# Altium PCB 00Key.PcbDoc (part 4 of 4)
Units mm, origin at the board's own origin, x right, y up, seen from the top; angles counter-clockwise.
Board outline 304.8 x 170.81 mm, 2 copper layers (F.Cu, B.Cu); 268 components, 236 nets, 1532 pads, 61 vias.
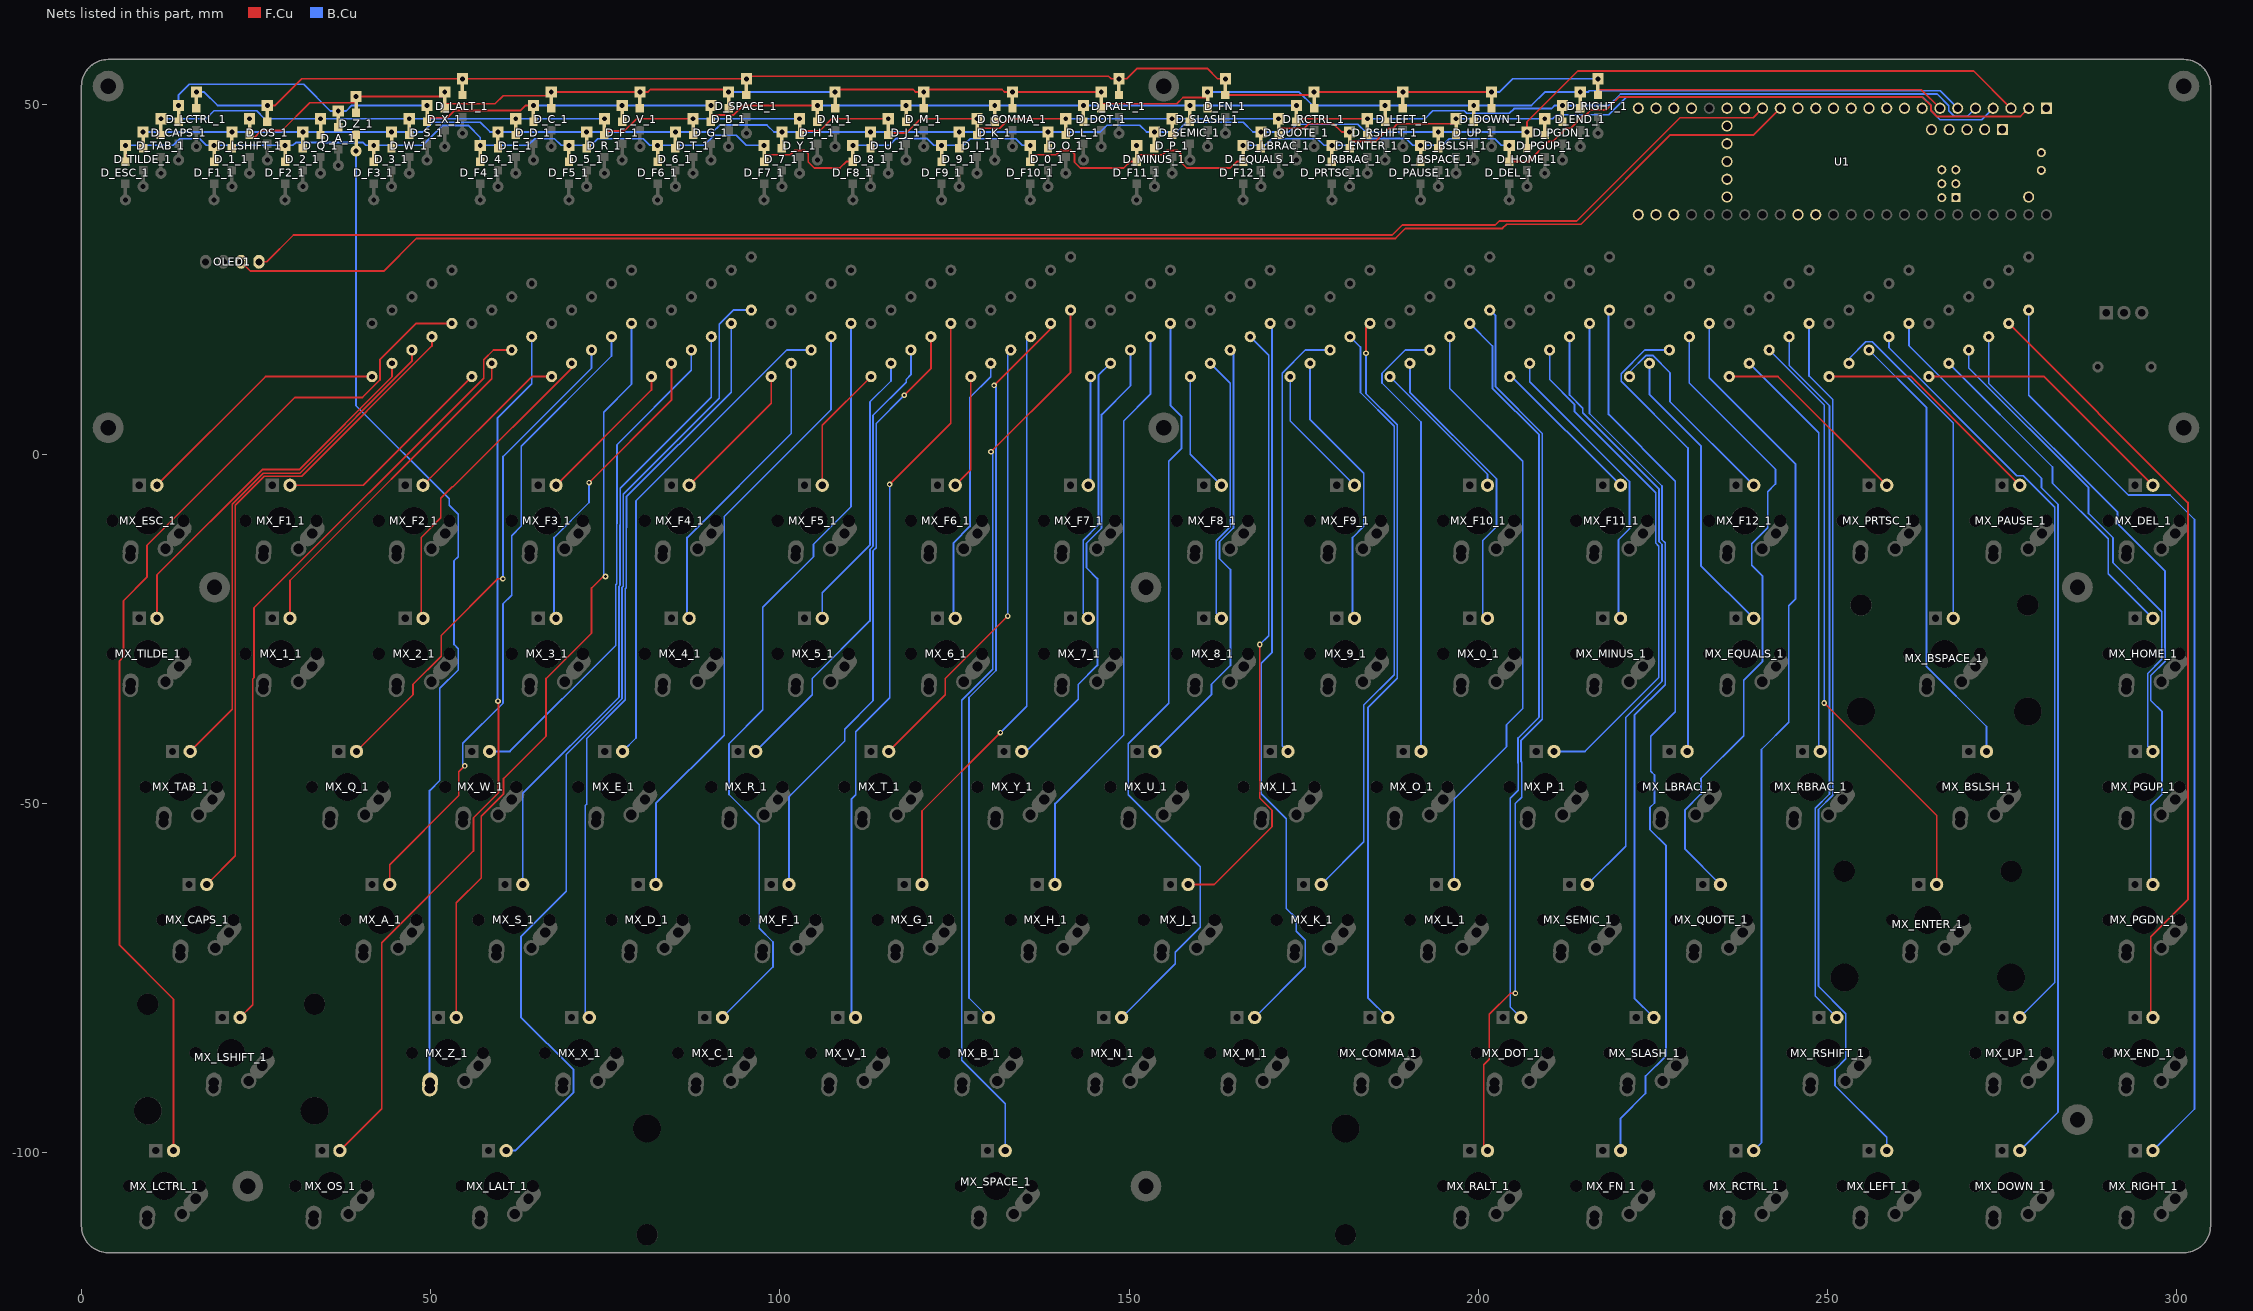
[diagram p4: the nets of this part, all layers, seen from the top]

## Via types
v1: diameter 0.8, hole 0.4, F.Cu to B.Cu, tented both sides, 61 vias

## Nets (pads, with @x,y where several pads share a name; then routed paths per layer and width w, separated by ;. In a path a pad name is that pad's centre, name@x,y a point inside that pad or via, vN(x,y) a via of type N, cw(c..) or ccw(c..) an arc to the next point about the centre after c; other vN are vias at no path point) (continued)
Net-(D_Z_1-Pad2): D_Z_1.2 MX_Z_1.2 | length 144.8
  F.Cu w0.25: D_Z_1.2@39.306,43.408 D_Z_1.2@39.306,44.608 D_Z_1.2@39.306,45.732
  B.Cu w0.25: D_Z_1.2@39.306,43.408 39.306,6.951 52.635,-6.377 52.635,-7.294 53.947,-8.606 53.947,-14.652 53.325,-15.274 53.325,-27.221 53.927,-27.823 53.927,-30.89 51.295,-33.522 51.295,-46.702 49.84,-48.157 49.84,-90.177 49.887,-90.225 49.847,-90.265 MX_Z_1.2@49.847,-90.804
Net-(MX_0_1-Pad3): MX_0_1.3 R_0_1.1 | length 42.8
  B.Cu w0.25: R_0_1.1@190.183,13.018 190.183,8.891 202.574,-3.5 202.574,-10.364 200.593,-12.344 200.593,-22.793 MX_0_1.3@201.294,-23.494
Net-(MX_1_1-Pad3): MX_1_1.3 R_1_1.1 | length 48.5
  F.Cu w0.25: MX_1_1.3@29.845,-23.494 29.845,-18.078 58.737,10.814 R_1_1.1@58.737,13.018
Net-(MX_2_1-Pad3): MX_2_1.3 R_2_1.1 | length 45.6
  F.Cu w0.25: MX_2_1.3@48.895,-23.494 48.627,-23.227 48.627,-11.927 51.448,-9.106 51.448,-6.301 53.105,-4.644 53.19,-4.644 70.168,12.333 R_2_1.1@70.168,13.018
Net-(MX_3_1-Pad3): MX_3_1.3 R_3_1.1 | length 43.6
  F.Cu w0.25: v1(72.666,-4.061) 84.454,7.728 R_3_1.1@84.454,13.018
  B.Cu w0.25: MX_3_1.3@67.944,-23.494 67.65,-23.2 67.65,-11.932 72.666,-6.916 v1(72.666,-4.061)
Net-(MX_4_1-Pad3): MX_4_1.3 R_4_1.1 | length 42.8
  B.Cu w0.25: MX_4_1.3@86.994,-23.494 86.699,-23.199 86.699,-11.933 101.601,2.969 R_4_1.1@101.601,13.018
Net-(MX_5_1-Pad3): MX_5_1.3 R_5_1.1 | length 40.6
  B.Cu w0.25: MX_5_1.3@106.044,-23.494 106.044,-19.831 112.872,-13.004 112.872,7.474 115.887,10.489 R_5_1.1@115.887,13.018
Net-(MX_6_1-Pad3): MX_6_1.3 R_6_1.1 | length 38.8
  B.Cu w0.25: MX_6_1.3@125.094,-23.494 124.85,-23.25 124.85,-12.674 127.193,-10.331 127.193,8.122 130.174,11.103 R_6_1.1@130.174,13.018
Net-(MX_7_1-Pad3): MX_7_1.3 R_7_1.1 | length 38.4
  B.Cu w0.25: MX_7_1.3@144.144,-23.494 143.427,-22.777 143.427,-12.293 145.588,-10.132 145.588,11.285 R_7_1.1@147.321,13.018
Net-(MX_8_1-Pad3): MX_8_1.3 R_8_1.1 | length 38.8
  B.Cu w0.25: R_8_1.1@161.607,13.018 164.472,10.153 164.472,-10.359 162.466,-12.365 162.466,-22.766 MX_8_1.3@163.194,-23.494
Net-(MX_9_1-Pad3): MX_9_1.3 R_9_1.1 | length 40.5
  B.Cu w0.25: R_9_1.1@175.894,13.018 175.894,4.932 183.56,-2.733 183.56,-10.328 181.976,-11.912 181.976,-23.226 MX_9_1.3@182.244,-23.494
Net-(MX_A_1-Pad3): MX_A_1.3 R_A_1.1 | length 91.8
  F.Cu w0.25: MX_A_1.3@44.133,-61.594 44.133,-58.746 54.021,-48.858 54.021,-45.48 v1(54.883,-44.619)
  B.Cu w0.25: v1(54.883,-44.619) 54.587,-44.323 54.587,-41.401 60.353,-35.635 60.353,-21.43 61.59,-20.192 61.59,-11.649 62.964,-10.275 62.964,1.148 75.882,14.067 R_A_1.1@75.882,16.828
Net-(MX_B_1-Pad3): MX_B_1.3 R_B_1.1 | length 105.6
  F.Cu w0.25: v1(130.655,9.861) 138.748,17.954 R_B_1.1@138.748,18.732
  B.Cu w0.25: MX_B_1.3@129.857,-80.644 127.054,-77.841 127.054,-34.832 130.93,-30.955 130.93,9.586 v1(130.655,9.861)
Net-(MX_BSLSH_1-Pad3): MX_BSLSH_1.3 R_BSLSH_1.1 | length 64.4
  B.Cu w0.25: R_BSLSH_1.1@255.904,14.922 264.153,6.674 264.153,-30.402 272.733,-38.982 MX_BSLSH_1.3@272.733,-42.544
Net-(MX_BSPACE_1-Pad3): MX_BSPACE_1.3 R_BSPACE_1.1 | length 49.4
  B.Cu w0.25: R_BSPACE_1.1@253.047,13.018 253.047,13.685 255.452,16.09 256.358,16.09 267.971,4.478 MX_BSPACE_1.3@267.971,-23.494
Net-(MX_C_1-Pad3): MX_C_1.3 R_C_1.1 | length 112.2
  B.Cu w0.25: MX_C_1.3@91.757,-80.644 99.003,-73.399 99.003,-69.838 97.014,-67.849 97.014,-53.021 92.703,-48.71 92.703,-41.433 97.533,-36.602 97.533,-21.92 104.79,-14.663 104.79,-12.891 110.172,-7.509 R_C_1.1@110.172,18.732
Net-(MX_CAPS_1-Pad3): MX_CAPS_1.3 R_CAPS_1.1 | length 94.9
  F.Cu w0.25: MX_CAPS_1.3@17.939,-61.594 22.026,-57.507 22.026,-7.323 26.183,-3.167 31.508,-3.167 50.165,15.491 R_CAPS_1.1@50.165,16.828
Net-(MX_COMMA_1-Pad3): MX_COMMA_1.3 R_COMMA_1.1 | length 104.4
  F.Cu w0.25: v1(183.893,14.469) 183.893,18.158 R_COMMA_1.1@184.468,18.732
  B.Cu w0.25: v1(183.893,14.469) 183.893,8.687 188.38,4.199 188.38,-32.061 184.166,-36.275 184.166,-77.803 MX_COMMA_1.3@187.007,-80.644
Net-(MX_D_1-Pad3): MX_D_1.3 R_D_1.1 | length 88.8
  B.Cu w0.25: MX_D_1.3@82.233,-61.594 82.233,-49.992 92.005,-40.219 92.005,-8.909 107.314,6.4 R_D_1.1@107.314,16.828
Net-(MX_DEL_1-Pad3): MX_DEL_1.3 R_DEL_1.1 | length 38.5
  F.Cu w0.25: R_DEL_1.1@264.477,11.112 280.988,11.112 MX_DEL_1.3@296.544,-4.444
Net-(MX_DOT_1-Pad3): MX_DOT_1.3 R_DOT_1.1 | length 105.9
  B.Cu w0.25: R_DOT_1.1@198.754,18.732 201.994,15.493 201.994,9.464 208.675,2.783 208.675,-37.613 205.651,-40.637 205.651,-44.191 205.697,-44.236 205.697,-48.107 204.555,-49.248 204.555,-79.142 MX_DOT_1.3@206.058,-80.644
Net-(MX_DOWN_1-Pad3): MX_DOWN_1.3 R_DOWN_1.1 | length 129.5
  B.Cu w0.25: R_DOWN_1.1@261.621,18.732 261.621,15.561 280.603,-3.421 280.603,-4.799 282.968,-7.164 282.968,-94.221 MX_DOWN_1.3@277.494,-99.694
Net-(MX_E_1-Pad3): MX_E_1.3 R_E_1.1 | length 70.7
  B.Cu w0.25: MX_E_1.3@77.471,-42.544 79.389,-40.626 79.389,-6.649 100.961,14.922 R_E_1.1@104.457,14.922
Net-(MX_END_1-Pad3): MX_END_1.3 R_END_1.1 | length 112.3
  F.Cu w0.25: R_END_1.1@275.907,18.732 301.561,-6.921 301.561,-63.771 296.252,-69.079 296.252,-80.352 MX_END_1.3@296.544,-80.644
Net-(MX_ENTER_1-Pad3): MX_ENTER_1.3 R_ENTER_1.1 | length 86.4
  F.Cu w0.25: v1(249.485,-35.616) 265.589,-51.719 MX_ENTER_1.3@265.589,-61.594
  B.Cu w0.25: R_ENTER_1.1@241.617,14.922 249.485,7.055 v1(249.485,-35.616)
Net-(MX_EQUALS_1-Pad3): MX_EQUALS_1.3 R_EQUALS_1.1 | length 42.7
  B.Cu w0.25: R_EQUALS_1.1@224.472,13.018 224.472,8.581 231.844,1.209 231.844,-15.944 MX_EQUALS_1.3@239.394,-23.494
Net-(MX_ESC_1-Pad3): MX_ESC_1.3 R_ESC_1.1 | length 37.2
  F.Cu w0.25: MX_ESC_1.3@10.795,-4.444 26.352,11.112 R_ESC_1.1@41.593,11.112
Net-(MX_F1_1-Pad3): MX_F1_1.3 R_F1_1.1 | length 32.5
  F.Cu w0.25: MX_F1_1.3@29.845,-4.444 40.323,-4.444 R_F1_1.1@55.88,11.112
Net-(MX_F2_1-Pad3): MX_F2_1.3 R_F2_1.1 | length 24.9
  F.Cu w0.25: MX_F2_1.3@48.895,-4.444 64.452,11.112 R_F2_1.1@67.311,11.112
Net-(MX_F3_1-Pad3): MX_F3_1.3 R_F3_1.1 | length 21.2
  F.Cu w0.25: MX_F3_1.3@67.944,-4.444 81.597,9.209 R_F3_1.1@81.597,11.112
Net-(MX_F4_1-Pad3): MX_F4_1.3 R_F4_1.1 | length 20.4
  F.Cu w0.25: MX_F4_1.3@86.994,-4.444 98.742,7.304 R_F4_1.1@98.742,11.112
Net-(MX_F5_1-Pad3): MX_F5_1.3 R_F5_1.1 | length 18.5
  F.Cu w0.25: MX_F5_1.3@106.044,-4.444 106.044,4.126 R_F5_1.1@113.031,11.112
Net-(MX_F6_1-Pad3): MX_F6_1.3 R_F6_1.1 | length 16.5
  F.Cu w0.25: MX_F6_1.3@125.094,-4.444 127.317,-2.221 R_F6_1.1@127.317,11.112
Net-(MX_F7_1-Pad3): MX_F7_1.3 R_F7_1.1 | length 15.7
  B.Cu w0.25: MX_F7_1.3@144.144,-4.444 144.463,-4.126 R_F7_1.1@144.463,11.112
Net-(MX_F8_1-Pad3): MX_F8_1.3 R_F8_1.1 | length 17.4
  B.Cu w0.25: R_F8_1.1@158.751,11.112 158.751,-0.001 MX_F8_1.3@163.194,-4.444
Net-(MX_F9_1-Pad3): MX_F9_1.3 R_F9_1.1 | length 19.4
  B.Cu w0.25: R_F9_1.1@173.037,11.112 173.037,4.763 MX_F9_1.3@182.244,-4.444
Net-(MX_F10_1-Pad3): MX_F10_1.3 R_F10_1.1 | length 21.3
  B.Cu w0.25: R_F10_1.1@187.324,11.112 201.294,-2.857 MX_F10_1.3@201.294,-4.444
Net-(MX_F11_1-Pad3): MX_F11_1.3 R_F11_1.1 | length 22.3
  B.Cu w0.25: R_F11_1.1@204.471,11.112 204.787,11.112 MX_F11_1.3@220.344,-4.444
Net-(MX_F12_1-Pad3): MX_F12_1.3 R_F12_1.1 | length 29.6
  B.Cu w0.25: R_F12_1.1@221.614,11.112 221.614,11.768 223.999,14.152 224.942,14.152 227.412,11.682 227.412,7.538 MX_F12_1.3@239.394,-4.444
Net-(MX_F_1-Pad3): MX_F_1.3 R_F_1.1 | length 86.8
  F.Cu w0.25: v1(117.804,8.432) 121.602,12.23 R_F_1.1@121.602,16.828
  B.Cu w0.25: MX_F_1.3@101.282,-61.594 101.282,-49.023 109.258,-41.047 109.258,-39.366 113.322,-35.303 113.322,-13.828 113.773,-13.377 113.773,4.401 v1(117.804,8.432)
Net-(MX_FN_1-Pad3): MX_FN_1.3 R_FN_1.1 | length 129.9
  B.Cu w0.25: R_FN_1.1@218.757,20.637 218.626,20.506 218.626,5.702 228.185,-3.857 228.185,-36.87 224.666,-40.388 224.666,-45.382 225.199,-45.914 225.199,-49.927 224.562,-50.564 224.562,-53.775 226.854,-56.066 226.854,-86.09 223.918,-89.026 223.918,-91.507 220.344,-95.081 MX_FN_1.3@220.344,-99.694
Net-(MX_G_1-Pad3): MX_G_1.3 R_G_1.1 | length 84.9
  F.Cu w0.25: MX_G_1.3@120.332,-61.594 120.332,-51.073 v1(131.554,-39.851)
  B.Cu w0.25: v1(131.554,-39.851) 135.337,-36.069 135.337,16.274 R_G_1.1@135.891,16.828
Net-(MX_H_1-Pad3): MX_H_1.3 R_H_1.1 | length 84.1
  B.Cu w0.25: MX_H_1.3@139.382,-61.594 139.382,-50.017 149.201,-40.198 149.201,4.751 153.034,8.584 R_H_1.1@153.034,16.828
Net-(MX_HOME_1-Pad3): MX_HOME_1.3 R_HOME_1.1 | length 48.6
  B.Cu w0.25: R_HOME_1.1@267.334,13.018 282.179,-1.827 282.179,-4.146 290.159,-12.126 290.159,-17.109 MX_HOME_1.3@296.544,-23.494
Net-(MX_I_1-Pad3): MX_I_1.3 R_I_1.1 | length 62.7
  B.Cu w0.25: MX_I_1.3@172.721,-42.544 171.912,-41.736 171.912,11.617 175.218,14.922 R_I_1.1@178.752,14.922
Net-(MX_J_1-Pad3): MX_J_1.3 R_J_1.1 | length 87.9
  F.Cu w0.25: MX_J_1.3@158.433,-61.594 162.167,-61.594 170.434,-53.328 170.434,-50.973 168.671,-49.21 v1(168.671,-27.243)
  B.Cu w0.25: R_J_1.1@167.322,16.828 169.955,14.195 169.955,-25.959 v1(168.671,-27.243)
Net-(MX_K_1-Pad3): MX_K_1.3 R_K_1.1 | length 85.4
  B.Cu w0.25: MX_K_1.3@177.482,-61.594 183.58,-55.497 183.58,-35.895 187.925,-31.55 187.925,4.018 183.102,8.841 183.102,15.336 R_K_1.1@181.611,16.828
Net-(MX_L_1-Pad3): MX_L_1.3 R_L_1.1 | length 86.8
  B.Cu w0.25: R_L_1.1@195.897,16.828 195.897,9.407 206.324,-1.019 206.324,-36.399 204.005,-38.717 204.005,-41.878 196.532,-49.351 MX_L_1.3@196.532,-61.594
Net-(MX_LALT_1-Pad3): MX_LALT_1.3 R_LALT_1.1 | length 143.4
  B.Cu w0.25: MX_LALT_1.3@60.801,-99.694 62.125,-99.694 70.455,-91.365 70.455,-88.124 62.908,-80.577 62.908,-69.061 69.393,-62.577 69.393,-42.979 77.398,-34.974 77.398,-19.072 77.548,-18.922 77.548,-10.322 77.568,-10.302 77.568,-5.708 91.299,8.023 91.299,18.602 93.335,20.637 R_LALT_1.1@95.884,20.637
Net-(MX_LBRAC_1-Pad3): MX_LBRAC_1.3 R_LBRAC_1.1 | length 66.4
  B.Cu w0.25: R_LBRAC_1.1@227.331,14.922 223.827,14.922 220.446,11.542 220.446,10.436 230,0.882 230,-42.415 MX_LBRAC_1.3@229.871,-42.544
Net-(MX_LCTRL_1-Pad3): MX_LCTRL_1.3 R_LCTRL_1.1 | length 150
  F.Cu w0.25: MX_LCTRL_1.3@13.176,-99.694 13.176,-78.017 5.458,-70.299 5.458,-29.583 6.023,-29.018 6.023,-20.974 9.369,-17.628 9.369,-13.057 30.544,8.119 40.216,8.119 42.722,10.625 42.722,13.518 47.937,18.732 R_LCTRL_1.1@53.023,18.732
Net-(MX_LEFT_1-Pad3): MX_LEFT_1.3 R_LEFT_1.1 | length 126
  B.Cu w0.25: R_LEFT_1.1@247.332,18.732 247.332,11.205 250.7,7.838 250.7,-48.841 248.676,-50.865 248.676,-76.168 252.596,-80.088 252.596,-86.543 251.043,-88.095 251.043,-90.396 258.444,-97.798 MX_LEFT_1.3@258.444,-99.694
Net-(MX_LSHIFT_1-Pad3): MX_LSHIFT_1.3 R_LSHIFT_1.1 | length 113.2
  F.Cu w0.25: MX_LSHIFT_1.3@22.701,-80.644 24.512,-78.834 24.512,-32.182 24.695,-31.999 24.695,-21.989 57.573,10.889 57.573,13.513 58.982,14.922 R_LSHIFT_1.1@61.594,14.922
Net-(MX_M_1-Pad3): MX_M_1.3 R_M_1.1 | length 105.7
  B.Cu w0.25: MX_M_1.3@167.957,-80.644 175.205,-73.398 175.205,-69.585 173.893,-68.274 173.893,-66.456 172.477,-65.039 172.477,-52.195 168.903,-48.621 168.903,-29.922 170.425,-28.4 170.425,18.488 R_M_1.1@170.181,18.732
Net-(MX_MINUS_1-Pad3): MX_MINUS_1.3 R_MINUS_1.1 | length 43.2
  B.Cu w0.25: R_MINUS_1.1@207.327,13.018 207.327,10.38 221.622,-3.915 221.622,-10.683 220.05,-12.255 220.05,-23.2 MX_MINUS_1.3@220.344,-23.494
Net-(MX_N_1-Pad3): MX_N_1.3 R_N_1.1 | length 112.1
  B.Cu w0.25: MX_N_1.3@148.907,-80.644 156.601,-72.951 156.601,-71.318 160.179,-67.74 160.179,-59.065 149.853,-48.739 149.853,-41.457 155.644,-35.666 155.644,-1.016 157.466,0.806 157.466,5.431 155.892,7.004 R_N_1.1@155.892,18.732
Net-(MX_O_1-Pad3): MX_O_1.3 R_O_1.1 | length 64.7
  B.Cu w0.25: MX_O_1.3@191.771,-42.544 191.771,4.618 186.191,10.197 186.191,11.613 189.501,14.922 R_O_1.1@193.041,14.922
Net-(MX_OS_1-Pad3): MX_OS_1.3 R_OS_1.1 | length 128
  F.Cu w0.25: MX_OS_1.3@36.989,-99.694 42.997,-93.687 42.997,-69.923 56.13,-56.79 56.13,-52.027 59.698,-48.459 59.698,-35.405 v1(59.628,-35.334)
  B.Cu w0.25: v1(59.628,-35.334) 59.573,-35.279 59.573,5.198 64.453,10.077 R_OS_1.1@64.453,16.828
Net-(MX_P_1-Pad3): MX_P_1.3 R_P_1.1 | length 72.7
  B.Cu w0.25: R_P_1.1@210.184,14.922 210.184,10.707 213.736,7.156 213.736,6.133 225.378,-5.509 225.378,-12.702 225.821,-13.145 225.821,-31.967 215.243,-42.544 MX_P_1.3@210.821,-42.544
Net-(MX_PAUSE_1-Pad3): MX_PAUSE_1.3 R_PAUSE_1.1 | length 33.7
  F.Cu w0.25: R_PAUSE_1.1@250.191,11.112 261.938,11.112 MX_PAUSE_1.3@277.494,-4.444
Net-(MX_PGDN_1-Pad3): MX_PGDN_1.3 R_PGDN_1.1 | length 91.2
  B.Cu w0.25: R_PGDN_1.1@273.051,16.828 273.051,10.128 291.493,-8.315 291.493,-9.942 298.301,-16.749 298.301,-29.626 296.258,-31.669 296.258,-35.262 297.864,-36.868 297.864,-48.649 296.249,-50.264 296.249,-61.299 MX_PGDN_1.3@296.544,-61.594
Net-(MX_PGUP_1-Pad3): MX_PGUP_1.3 R_PGUP_1.1 | length 70.1
  B.Cu w0.25: R_PGUP_1.1@270.192,14.922 270.192,12.349 287.341,-4.8 287.341,-8.478 290.834,-11.971 290.834,-15.537 297.836,-22.539 297.836,-29.369 295.808,-31.398 295.808,-41.808 MX_PGUP_1.3@296.544,-42.544
Net-(MX_PRTSC_1-Pad3): MX_PRTSC_1.3 R_PRTSC_1.1 | length 29
  F.Cu w0.25: R_PRTSC_1.1@235.903,11.112 242.887,11.112 MX_PRTSC_1.3@258.444,-4.444
Net-(MX_Q_1-Pad3): MX_Q_1.3 R_Q_1.1 | length 71.8
  F.Cu w0.25: MX_Q_1.3@39.37,-42.544 47.469,-34.446 47.469,-32.939 51.505,-28.903 51.505,-25.942 59.609,-17.838 v1(60.338,-17.838)
  B.Cu w0.25: v1(60.338,-17.838) 60.339,-0.334 73.024,12.352 R_Q_1.1@73.024,14.922
Net-(MX_QUOTE_1-Pad3): MX_QUOTE_1.3 R_QUOTE_1.1 | length 92.3
  B.Cu w0.25: R_QUOTE_1.1@230.188,16.828 230.188,10.201 242.525,-2.136 242.525,-4.246 241.404,-5.367 241.404,-10.51 239.118,-12.797 239.118,-15.906 240.672,-17.461 240.672,-29.64 237.968,-32.345 237.968,-40.3 231.844,-46.424 231.844,-48.646 229.576,-50.915 229.576,-56.538 MX_QUOTE_1.3@234.632,-61.594
Net-(MX_R_1-Pad3): MX_R_1.3 R_R_1.1 | length 66.7
  B.Cu w0.25: MX_R_1.3@96.521,-42.544 104.618,-34.447 104.618,-32.113 112.871,-23.86 112.871,-13.642 113.323,-13.19 113.323,5.567 118.079,10.323 118.079,10.708 118.744,11.373 R_R_1.1@118.744,14.922
Net-(MX_RALT_1-Pad3): MX_RALT_1.3 R_RALT_1.1 | length 127.6
  F.Cu w0.25: MX_RALT_1.3@201.294,-99.694 200.741,-99.141 200.741,-87.424 201.543,-86.623 201.543,-80.196 204.58,-77.159 v1(205.281,-77.159)
  B.Cu w0.25: R_RALT_1.1@201.612,20.637 202.444,19.806 202.444,9.65 209.125,2.969 209.125,-37.928 206.102,-40.951 206.102,-44.005 206.201,-44.104 206.201,-49.08 205.281,-50 v1(205.281,-77.159)
Net-(MX_RBRAC_1-Pad3): MX_RBRAC_1.3 R_RBRAC_1.1 | length 59.8
  B.Cu w0.25: R_RBRAC_1.1@238.761,13.018 248.698,3.08 248.698,-42.322 MX_RBRAC_1.3@248.921,-42.544
Net-(MX_RCTRL_1-Pad3): MX_RCTRL_1.3 R_RCTRL_1.1 | length 126
  B.Cu w0.25: R_RCTRL_1.1@233.044,18.732 233.044,10.939 245.396,-1.412 245.396,-20.704 244.405,-21.695 244.405,-38.385 240.514,-42.276 240.514,-98.575 MX_RCTRL_1.3@239.394,-99.694
Net-(MX_RIGHT_1-Pad3): MX_RIGHT_1.3 R_RIGHT_1.1 | length 136.1
  B.Cu w0.25: R_RIGHT_1.1@278.764,20.637 278.764,8.428 293.025,-5.833 299,-5.833 302.508,-9.342 302.508,-93.731 MX_RIGHT_1.3@296.544,-99.694
Net-(MX_RSHIFT_1-Pad3): MX_RSHIFT_1.3 R_RSHIFT_1.1 | length 102
  B.Cu w0.25: R_RSHIFT_1.1@244.474,16.828 244.474,12.702 250.249,6.928 250.249,-48.64 248.225,-50.664 248.225,-77.568 MX_RSHIFT_1.3@251.301,-80.644
Net-(MX_S_1-Pad3): MX_S_1.3 R_S_1.1 | length 89.6
  B.Cu w0.25: MX_S_1.3@63.182,-61.594 63.182,-48.552 76.947,-34.787 76.947,-18.886 77.098,-18.735 77.098,-10.135 77.117,-10.115 77.117,-4.885 90.171,8.169 R_S_1.1@90.171,16.828
Net-(MX_SEMIC_1-Pad3): MX_SEMIC_1.3 R_SEMIC_1.1 | length 88.3
  B.Cu w0.25: R_SEMIC_1.1@213.042,16.828 213.042,8.486 214.937,6.592 214.937,5.955 225.828,-4.936 225.828,-12.472 226.271,-12.916 226.271,-32.483 221.072,-37.682 221.072,-56.105 MX_SEMIC_1.3@215.582,-61.594
Net-(MX_SLASH_1-Pad3): MX_SLASH_1.3 R_SLASH_1.1 | length 106.8
  B.Cu w0.25: R_SLASH_1.1@215.901,18.732 215.901,5.825 226.278,-4.553 226.278,-12.236 226.721,-12.679 226.721,-32.988 222.319,-37.39 222.319,-77.856 MX_SLASH_1.3@225.107,-80.644
Net-(MX_SPACE_1-Pad3): MX_SPACE_1.3 R_SPACE_1.1 | length 129.6
  F.Cu w0.25: v1(130.205,0.362) 141.604,11.761 R_SPACE_1.1@141.604,20.637
  B.Cu w0.25: v1(130.205,0.362) 130.464,0.102 130.464,-30.784 126.04,-35.209 126.04,-86.761 132.239,-92.96 MX_SPACE_1.3@132.239,-99.694
Net-(MX_T_1-Pad3): MX_T_1.3 R_T_1.1 | length 64.7
  F.Cu w0.25: MX_T_1.3@115.571,-42.544 123.668,-34.447 123.668,-32.113 v1(132.617,-23.165)
  B.Cu w0.25: v1(132.617,-23.165) 132.617,14.507 R_T_1.1@133.032,14.922
Net-(MX_TAB_1-Pad3): MX_TAB_1.3 R_TAB_1.1 | length 73.7
  F.Cu w0.25: MX_TAB_1.3@15.557,-42.544 21.575,-36.527 21.575,-7.137 25.996,-2.716 31.292,-2.716 47.307,13.299 R_TAB_1.1@47.307,14.922
Net-(MX_TILDE_1-Pad3): MX_TILDE_1.3 R_TILDE_1.1 | length 53.6
  F.Cu w0.25: MX_TILDE_1.3@10.795,-23.494 10.795,-17.28 25.881,-2.195 31.177,-2.195 44.45,11.079 R_TILDE_1.1@44.45,13.018
Net-(MX_U_1-Pad3): MX_U_1.3 R_U_1.1 | length 63.6
  B.Cu w0.25: MX_U_1.3@153.671,-42.544 161.768,-34.447 161.768,-32.958 164.494,-30.232 164.494,-16.515 162.916,-14.937 162.916,-12.552 164.923,-10.546 164.923,14.464 R_U_1.1@164.464,14.922
Net-(MX_UP_1-Pad3): MX_UP_1.3 R_UP_1.1 | length 109.9
  B.Cu w0.25: R_UP_1.1@258.762,16.828 258.762,15.236 277.065,-3.067 277.971,-3.067 282.518,-7.614 282.518,-75.621 MX_UP_1.3@277.494,-80.644
Net-(MX_V_1-Pad3): MX_V_1.3 R_V_1.1 | length 105.5
  F.Cu w0.25: v1(115.699,-4.318) 124.461,4.443 R_V_1.1@124.461,18.732
  B.Cu w0.25: MX_V_1.3@110.807,-80.644 110.247,-80.084 110.247,-49.33 110.834,-48.743 110.834,-39.751 115.699,-34.885 v1(115.699,-4.318)
Net-(MX_W_1-Pad3): MX_W_1.3 R_W_1.1 | length 71.1
  B.Cu w0.25: MX_W_1.3@58.42,-42.544 61.333,-42.544 76.497,-27.381 76.497,-18.699 76.647,-18.549 76.647,-9.949 76.667,-9.929 76.667,1.376 87.312,12.021 R_W_1.1@87.312,14.922
Net-(MX_X_1-Pad3): MX_X_1.3 R_X_1.1 | length 108.3
  B.Cu w0.25: MX_X_1.3@72.707,-80.644 72.137,-80.074 72.137,-50.279 72.321,-50.096 72.321,-40.688 77.848,-35.161 77.848,-19.259 77.998,-19.108 77.998,-10.508 78.018,-10.489 78.018,-6.11 93.027,8.9 R_X_1.1@93.027,18.732
Net-(MX_Y_1-Pad3): MX_Y_1.3 R_Y_1.1 | length 65.6
  B.Cu w0.25: MX_Y_1.3@134.621,-42.544 135.264,-42.544 142.718,-35.091 142.718,-32.958 145.444,-30.232 145.444,-17.798 143.877,-16.231 143.877,-12.726 146.038,-10.565 146.038,5.679 150.177,9.818 R_Y_1.1@150.177,14.922
Net-(MX_Z_1-Pad3): MX_Z_1.3 R_Z_1.1 | length 110.2
  F.Cu w0.25: MX_Z_1.3@53.657,-80.644 53.657,-64.223 57.219,-60.662 57.219,-51.821 60.43,-48.61 60.43,-46.424 66.518,-40.336 66.518,-32.113 73.032,-25.599 73.032,-19.155 74.685,-17.502 v1(75.022,-17.502)
  B.Cu w0.25: v1(75.022,-17.502) 74.764,-17.244 74.764,6.034 78.741,10.01 R_Z_1.1@78.741,18.732
Net-(U1-Pad1): U1.1
Net-(U1-Pad8): U1.8
Net-(U1-Pad9): U1.9
Net-(U1-Pad10): U1.10
Net-(U1-Pad11): U1.11
Net-(U1-Pad12): U1.12
Net-(U1-Pad13): U1.13
Net-(U1-Pad14): U1.14
Net-(U1-Pad15): U1.15
Net-(U1-Pad18): U1.18
Net-(U1-Pad19): U1.19
Net-(U1-Pad21): U1.21
Net-(U1-Pad22): U1.22
Net-(U1-Pad23): U1.23
Net-(U1-Pad24): U1.24
Net-(U1-Pad25): U1.25
Net-(U1-Pad26): U1.26
Net-(U1-Pad27): U1.27
Net-(U1-Pad34): U1.34
Net-(U1-Pad35): U1.35
Net-(U1-Pad49): U1.49
Net-(U1-Pad50): U1.50
Net-(U1-Pad51): U1.51
Net-(U1-Pad52): U1.52
Net-(U1-Pad53): U1.53
Net-(U1-Pad54): U1.54
Net-(U1-Pad55): U1.55
Net-(U1-Pad56): U1.56
Net-(U1-Pad57): U1.57
Net-(U1-Pad58): U1.58
Net-(U1-Pad59): U1.59
Net-(U1-Pad60): U1.60
Net-(U1-Pad61): U1.61
Net-(U1-Pad62): U1.62
Net-(U1-Pad63): U1.63
Net-(U1-Pad64): U1.64
Net-(U1-Pad65): U1.65
Net-(U1-Pad66): U1.66
Net-(U1-Pad67): U1.67
OLEDSCL: OLED1.3 U1.16 | length 230.6
  F.Cu w0.25: OLED1.3@22.859,27.554 24.195,26.219 43.265,26.219 47.93,30.884 188.109,30.884 189.556,32.33 203.423,32.33 204.033,32.94 214.67,32.94 227.45,45.72 239.394,45.72 U1.16@243.204,49.53
OLEDSDA: OLED1.4 U1.17 | length 224.4
  F.Cu w0.25: OLED1.4@25.399,27.554 26.525,27.554 30.355,31.384 187.654,31.384 189.088,32.818 202.393,32.818 202.966,33.39 214.053,33.39 228.843,48.18 239.315,48.18 U1.17@240.664,49.53
row0: D_DEL_1.1 D_ESC_1.1 D_F1_1.1 D_F2_1.1 D_F3_1.1 D_F4_1.1 D_F5_1.1 D_F6_1.1 D_F7_1.1 D_F8_1.1 D_F9_1.1 D_F10_1.1 D_F11_1.1 D_F12_1.1 D_PAUSE_1.1 D_PRTSC_1.1 U1.2 | length 333.5
  F.Cu w0.25: D_ESC_1.1@6.286,41.898 D_ESC_1.1@6.286,43.022 D_ESC_1.1@6.286,44.222 ; D_F1_1.1@18.986,41.898 D_F1_1.1@18.986,43.022 D_F1_1.1@18.986,44.222 ; D_F2_1.1@29.146,41.898 D_F2_1.1@29.146,43.022 D_F2_1.1@29.146,44.222 ; D_F3_1.1@41.846,41.898 D_F3_1.1@41.846,43.022 D_F3_1.1@41.846,44.222 ; D_F4_1.1@57.087,41.898 D_F4_1.1@57.087,43.022 D_F4_1.1@57.087,44.222 ; D_F5_1.1@69.787,41.898 D_F5_1.1@69.787,43.022 D_F5_1.1@69.787,44.222 ; D_F6_1.1@82.486,41.898 D_F6_1.1@82.486,43.022 D_F6_1.1@82.486,44.222 ; D_F7_1.1@97.727,41.898 D_F7_1.1@97.727,42.877 ; D_F7_1.1@97.727,44.222 D_F7_1.1@97.727,43.022 D_F7_1.1@97.727,42.877 ; D_F8_1.1@110.426,44.222 D_F8_1.1@110.426,43.022 D_F8_1.1@110.426,41.898 109.501,41.898 108.577,40.973 104.911,40.973 104.051,41.833 104.051,42.993 103.561,43.483 102.071,43.483 101.466,42.877 D_F7_1.1@97.727,42.877 ; D_F9_1.1@123.126,41.898 D_F9_1.1@123.126,43.022 D_F9_1.1@123.126,44.222 ; D_F10_1.1@135.826,41.898 D_F10_1.1@135.826,42.877 ; D_F10_1.1@135.826,44.222 D_F10_1.1@135.826,43.022 D_F10_1.1@135.826,42.877 ; D_F11_1.1@151.066,44.222 D_F11_1.1@151.066,43.022 D_F11_1.1@151.066,42.877 ; D_F12_1.1@166.306,44.222 D_F12_1.1@166.306,43.022 D_F12_1.1@166.306,41.898 165.381,41.898 164.456,40.973 158.251,40.973 157.391,41.833 157.391,42.993 156.901,43.483 155.411,43.483 154.806,42.877 D_F11_1.1@151.066,42.877 ; D_PRTSC_1.1@179.006,41.898 D_PRTSC_1.1@179.006,43.022 D_PRTSC_1.1@179.006,44.222 ; D_PAUSE_1.1@191.707,41.898 D_PAUSE_1.1@191.707,43.022 D_PAUSE_1.1@191.707,44.222 ; D_DEL_1.1@204.406,44.222 D_DEL_1.1@204.406,43.022 D_DEL_1.1@204.406,41.898 207.146,41.898 210.031,44.782 210.666,44.782 212.571,46.687 213.206,46.687 215.111,48.592 215.421,48.592 216.107,49.278 218.268,49.278 220.142,51.152 263.544,51.152 264.794,49.902 264.794,49.166 265.592,48.369 277.604,48.369 U1.2@278.764,49.53 ; D_F10_1.1@135.826,42.877 139.566,42.877 140.171,43.483 141.661,43.483 142.151,42.993 142.151,41.833 143.011,40.973 149.217,40.973 150.141,41.898 D_F11_1.1@151.066,41.898 D_F11_1.1@151.066,42.877
  B.Cu w0.25: D_ESC_1.1@6.286,44.222 13.13,44.222 14.078,45.171 16.913,45.171 17.861,44.222 D_F1_1.1@18.986,44.222 D_F2_1.1@29.146,44.222 30.272,44.222 30.666,44.617 40.327,44.617 40.721,44.222 41.284,44.222 D_F3_1.1@41.846,44.222 48.879,44.222 51.73,47.074 55.361,47.074 57.087,45.348 D_F4_1.1@57.087,44.222 63.93,44.222 64.878,45.171 67.713,45.171 68.661,44.222 D_F5_1.1@69.787,44.222 72.962,44.222 73.91,45.171 80.413,45.171 81.361,44.222 D_F6_1.1@82.486,44.222 89.129,44.222 90.562,45.656 93.733,45.656 95.167,44.222 D_F7_1.1@97.727,44.222 ; D_F8_1.1@110.426,44.222 115.676,44.222 116.669,45.216 121.007,45.216 122.001,44.222 D_F9_1.1@123.126,44.222 126.301,44.222 127.25,45.171 133.753,45.171 134.701,44.222 D_F10_1.1@135.826,44.222 ; D_F12_1.1@166.306,44.222 169.481,44.222 170.43,45.171 176.933,45.171 177.881,44.222 D_PRTSC_1.1@179.006,44.222 182.181,44.222 183.175,45.216 189.587,45.216 190.581,44.222 D_PAUSE_1.1@191.707,44.222 194.881,44.222 195.83,45.171 202.333,45.171 203.281,44.222 D_DEL_1.1@204.406,44.222
row1: D_0_1.1 D_1_1.1 D_2_1.1 D_3_1.1 D_4_1.1 D_5_1.1 D_6_1.1 D_7_1.1 D_8_1.1 D_9_1.1 D_BSPACE_1.1 D_EQUALS_1.1 D_HOME_1.1 D_MINUS_1.1 D_TILDE_1.1 U1.3 | length 313.9
  F.Cu w0.25: D_TILDE_1.1@8.826,43.803 D_TILDE_1.1@8.826,44.927 D_TILDE_1.1@8.826,46.127 ; D_1_1.1@21.526,43.803 D_1_1.1@21.526,44.927 D_1_1.1@21.526,46.127 ; D_2_1.1@31.686,43.803 D_2_1.1@31.686,44.927 D_2_1.1@31.686,46.127 ; D_3_1.1@44.386,43.803 D_3_1.1@44.386,44.927 D_3_1.1@44.386,46.127 ; D_4_1.1@59.627,43.803 D_4_1.1@59.627,44.927 D_4_1.1@59.627,46.127 ; D_5_1.1@72.326,43.803 D_5_1.1@72.326,44.927 D_5_1.1@72.326,46.127 ; D_6_1.1@85.026,43.803 D_6_1.1@85.026,44.927 D_6_1.1@85.026,46.127 ; D_7_1.1@100.266,43.803 D_7_1.1@100.266,44.927 D_7_1.1@100.266,46.127 ; D_8_1.1@112.966,43.803 D_8_1.1@112.966,44.927 D_8_1.1@112.966,46.127 ; D_9_1.1@125.666,43.803 D_9_1.1@125.666,44.927 D_9_1.1@125.666,46.127 ; D_0_1.1@138.367,43.803 D_0_1.1@138.367,44.927 D_0_1.1@138.367,46.127 ; D_MINUS_1.1@153.606,43.803 D_MINUS_1.1@153.606,44.927 D_MINUS_1.1@153.606,46.127 ; D_EQUALS_1.1@168.846,43.803 D_EQUALS_1.1@168.846,44.927 D_EQUALS_1.1@168.846,46.127 ; D_BSPACE_1.1@194.246,43.803 D_BSPACE_1.1@194.246,44.927 D_BSPACE_1.1@194.246,46.127 ; D_HOME_1.1@206.946,43.803 D_HOME_1.1@206.946,44.927 D_HOME_1.1@206.946,46.127 206.946,47.602 214.217,54.873 270.882,54.873 U1.3@276.224,49.53
  B.Cu w0.25: D_TILDE_1.1@8.826,46.127 D_1_1.1@21.526,46.127 D_2_1.1@31.686,46.127 D_3_1.1@44.386,46.127 48.869,46.127 50.267,47.526 57.103,47.526 58.501,46.127 D_4_1.1@59.627,46.127 D_5_1.1@72.326,46.127 D_6_1.1@85.026,46.127 90.397,46.127 91.394,47.125 98.144,47.125 99.141,46.127 D_7_1.1@100.266,46.127 D_8_1.1@112.966,46.127 D_9_1.1@125.666,46.127 D_0_1.1@138.367,46.127 145.843,46.127 146.811,47.096 151.513,47.096 152.481,46.127 D_MINUS_1.1@153.606,46.127 156.781,46.127 158.18,47.526 166.322,47.526 167.721,46.127 D_EQUALS_1.1@168.846,46.127 172.854,46.127 173.979,47.253 182.737,47.253 183.862,46.127 D_BSPACE_1.1@194.246,46.127 D_HOME_1.1@206.946,46.127
row2: D_BSLSH_1.1 D_E_1.1 D_I_1.1 D_LBRAC_1.1 D_O_1.1 D_P_1.1 D_PGUP_1.1 D_Q_1.1 D_R_1.1 D_RBRAC_1.1 D_T_1.1 D_TAB_1.1 D_U_1.1 D_W_1.1 D_Y_1.1 U1.4 | length 306.5
  F.Cu w0.25: D_TAB_1.1@11.367,45.708 D_TAB_1.1@11.367,46.832 D_TAB_1.1@11.367,48.032 ; D_Q_1.1@34.227,45.708 D_Q_1.1@34.227,46.832 D_Q_1.1@34.227,48.032 ; D_W_1.1@46.926,45.708 D_W_1.1@46.926,46.832 D_W_1.1@46.926,48.032 ; D_E_1.1@62.166,45.708 D_E_1.1@62.166,46.832 D_E_1.1@62.166,48.032 ; D_R_1.1@74.867,45.708 D_R_1.1@74.867,46.27 ; D_R_1.1@74.867,48.032 D_R_1.1@74.867,46.832 74.867,46.551 D_R_1.1@74.867,46.27 ; D_T_1.1@87.566,45.708 D_T_1.1@87.566,46.832 D_T_1.1@87.566,48.032 86.441,48.032 79.489,48.032 77.726,46.27 D_R_1.1@74.867,46.27 ; D_Y_1.1@102.806,45.708 D_Y_1.1@102.806,46.27 ; D_Y_1.1@102.806,48.032 D_Y_1.1@102.806,46.832 D_Y_1.1@102.806,46.27 ; D_U_1.1@115.506,45.708 D_U_1.1@115.506,45.989 ; D_I_1.1@128.207,45.708 D_I_1.1@128.207,46.674 ; D_O_1.1@140.906,45.708 D_O_1.1@140.906,46.832 D_O_1.1@140.906,48.032 139.781,48.032 132.829,48.032 131.471,46.674 D_I_1.1@128.207,46.674 ; D_P_1.1@156.147,45.708 D_P_1.1@156.147,46.832 D_P_1.1@156.147,48.032 ; D_LBRAC_1.1@171.386,45.708 D_LBRAC_1.1@171.386,46.687 ; D_LBRAC_1.1@171.386,48.032 D_LBRAC_1.1@171.386,46.832 D_LBRAC_1.1@171.386,46.687 ; D_RBRAC_1.1@181.546,43.803 D_RBRAC_1.1@181.546,44.782 ; D_BSLSH_1.1@196.786,45.708 D_BSLSH_1.1@196.786,46.832 D_BSLSH_1.1@196.786,47.303 ; D_BSLSH_1.1@196.786,48.032 D_BSLSH_1.1@196.786,47.303 ; D_PGUP_1.1@209.486,45.708 D_PGUP_1.1@209.486,46.832 D_PGUP_1.1@209.486,48.032 ; D_Y_1.1@102.806,46.27 105.666,46.27 107.429,48.032 114.381,48.032 D_U_1.1@115.506,48.032 D_U_1.1@115.506,46.832 D_U_1.1@115.506,45.989 ; D_U_1.1@115.506,45.989 118.085,45.989 120.129,48.032 127.081,48.032 D_I_1.1@128.207,48.032 D_I_1.1@128.207,46.832 D_I_1.1@128.207,46.674 ; D_LBRAC_1.1@171.386,46.687 175.066,46.687 175.71,47.331 179.218,47.331 180.421,46.127 D_RBRAC_1.1@181.546,46.127 D_RBRAC_1.1@181.546,44.927 D_RBRAC_1.1@181.546,44.782 ; D_RBRAC_1.1@181.546,44.782 185.266,44.782 187.171,46.687 187.777,46.687 188.393,47.303 D_BSLSH_1.1@196.786,47.303
  B.Cu w0.25: D_TAB_1.1@11.367,48.032 17.848,48.032 18.973,49.158 25.071,49.158 26.196,48.032 D_Q_1.1@34.227,48.032 35.352,48.032 35.367,48.017 45.786,48.017 45.801,48.032 D_W_1.1@46.926,48.032 48.052,48.032 61.041,48.032 D_E_1.1@62.166,48.032 D_R_1.1@74.867,48.032 ; D_T_1.1@87.566,48.032 D_Y_1.1@102.806,48.032 ; D_O_1.1@140.906,48.032 D_P_1.1@156.147,48.032 D_LBRAC_1.1@171.386,48.032 ; D_BSLSH_1.1@196.786,48.032 D_PGUP_1.1@209.486,48.032 210.049,48.032 210.612,48.032 211.171,48.592 218.627,48.592 221.161,51.126 263.588,51.126 264.794,49.919 264.794,49.183 266.078,47.9 272.054,47.9 U1.4@273.684,49.53
row3: D_A_1.1 D_CAPS_1.1 D_D_1.1 D_ENTER_1.1 D_F_1.1 D_G_1.1 D_H_1.1 D_J_1.1 D_K_1.1 D_L_1.1 D_PGDN_1.1 D_QUOTE_1.1 D_S_1.1 D_SEMIC_1.1 U1.5 | length 299.1
  F.Cu w0.25: D_CAPS_1.1@13.906,47.613 D_CAPS_1.1@13.906,48.737 D_CAPS_1.1@13.906,49.937 ; D_A_1.1@36.767,46.818 D_A_1.1@36.767,47.942 D_A_1.1@36.767,49.143 ; D_S_1.1@49.466,47.613 D_S_1.1@49.466,48.175 ; D_S_1.1@49.466,49.937 D_S_1.1@49.466,48.737 D_S_1.1@49.466,48.175 ; D_D_1.1@64.706,47.613 64.706,47.95 D_D_1.1@64.706,48.737 D_D_1.1@64.706,49.937 63.581,49.937 62.841,49.198 53.389,49.198 52.366,48.175 D_S_1.1@49.466,48.175 ; D_F_1.1@77.406,47.613 77.406,47.95 77.406,48.344 D_F_1.1@77.406,48.737 D_F_1.1@77.406,49.937 ; D_G_1.1@90.106,47.613 D_G_1.1@90.106,48.579 ; D_G_1.1@90.106,49.937 D_G_1.1@90.106,48.737 D_G_1.1@90.106,48.579 ; D_H_1.1@105.346,47.613 105.346,47.95 D_H_1.1@105.346,48.737 D_H_1.1@105.346,49.937 104.221,49.937 94.736,49.937 93.378,48.579 D_G_1.1@90.106,48.579 ; D_J_1.1@118.046,47.613 118.046,47.95 118.046,48.344 D_J_1.1@118.046,48.737 D_J_1.1@118.046,49.937 ; D_K_1.1@130.746,47.613 130.746,47.95 130.746,48.344 D_K_1.1@130.746,48.737 D_K_1.1@130.746,49.937 ; D_L_1.1@143.446,47.613 D_L_1.1@143.446,48.737 D_L_1.1@143.446,49.937 ; D_SEMIC_1.1@158.686,47.613 D_SEMIC_1.1@158.686,48.737 D_SEMIC_1.1@158.686,49.937 ; D_QUOTE_1.1@173.927,47.613 D_QUOTE_1.1@173.927,48.032 ; D_QUOTE_1.1@173.927,49.937 D_QUOTE_1.1@173.927,48.737 D_QUOTE_1.1@173.927,48.032 ; D_ENTER_1.1@184.087,45.708 D_ENTER_1.1@184.087,46.832 D_ENTER_1.1@184.087,48.032 182.961,48.032 D_QUOTE_1.1@173.927,48.032 ; D_PGDN_1.1@212.026,47.613 D_PGDN_1.1@212.026,48.737 D_PGDN_1.1@212.026,49.937
  B.Cu w0.25: D_CAPS_1.1@13.906,49.937 13.906,51.452 15.422,52.968 31.816,52.968 35.641,49.143 D_A_1.1@36.767,49.143 37.892,49.143 38.687,49.937 D_S_1.1@49.466,49.937 ; D_D_1.1@64.706,49.937 D_F_1.1@77.406,49.937 D_G_1.1@90.106,49.937 ; D_H_1.1@105.346,49.937 D_J_1.1@118.046,49.937 D_K_1.1@130.746,49.937 D_L_1.1@143.446,49.937 D_SEMIC_1.1@158.686,49.937 D_QUOTE_1.1@173.927,49.937 ; D_ENTER_1.1@184.087,48.032 192.341,48.032 193.467,49.158 197.977,49.158 198.322,48.812 204.42,48.812 205.095,49.487 210.451,49.487 210.901,49.937 D_PGDN_1.1@212.026,49.937 218.699,49.937 220.337,51.576 265.669,51.576 267.334,49.91 267.334,49.153 268.087,48.4 270.015,48.4 U1.5@271.144,49.53
row4: D_B_1.1 D_C_1.1 D_COMMA_1.1 D_DOT_1.1 D_END_1.1 D_LSHIFT_1.1 D_M_1.1 D_N_1.1 D_RSHIFT_1.1 D_SLASH_1.1 D_UP_1.1 D_V_1.1 D_X_1.1 D_Z_1.1 U1.6 | length 285.2
  F.Cu w0.25: D_LSHIFT_1.1@24.066,48.032 D_LSHIFT_1.1@24.066,46.832 D_LSHIFT_1.1@24.066,45.708 24.066,45.257 24.642,45.257 25.736,46.351 28.711,46.351 32.676,50.316 D_Z_1.1@39.306,50.316 ; D_Z_1.1@39.306,48.883 D_Z_1.1@39.306,50.007 D_Z_1.1@39.306,50.316 ; D_X_1.1@52.006,49.518 D_X_1.1@52.006,50.179 ; D_X_1.1@52.006,51.842 D_X_1.1@52.006,51.207 ; D_C_1.1@67.246,49.518 D_C_1.1@67.246,50.642 D_C_1.1@67.246,51.34 ; D_V_1.1@79.947,49.518 D_V_1.1@79.947,50.642 79.947,51.28 D_V_1.1@79.384,51.842 ; D_B_1.1@92.647,49.518 92.647,50.177 D_B_1.1@92.647,50.642 D_B_1.1@92.647,51.842 92.647,52.218 81.447,52.218 81.072,51.842 D_V_1.1@79.947,51.842 D_V_1.1@79.384,51.842 ; D_N_1.1@107.886,49.518 D_N_1.1@107.886,50.642 D_N_1.1@107.886,51.842 107.886,52.03 107.886,52.218 119.086,52.218 119.461,51.842 D_M_1.1@120.587,51.842 ; D_M_1.1@120.587,49.518 D_M_1.1@120.587,50.642 D_M_1.1@120.587,51.842 ; D_COMMA_1.1@133.286,49.518 D_COMMA_1.1@133.286,50.642 133.286,51.28 D_COMMA_1.1@133.849,51.842 ; D_DOT_1.1@145.987,49.518 D_DOT_1.1@145.987,50.163 ; D_SLASH_1.1@161.226,49.518 D_SLASH_1.1@161.226,50.642 D_SLASH_1.1@161.226,51.079 ; D_SLASH_1.1@161.226,51.842 D_SLASH_1.1@161.226,51.079 ; D_RSHIFT_1.1@186.626,47.613 D_RSHIFT_1.1@186.626,48.737 D_RSHIFT_1.1@186.626,49.937 ; D_UP_1.1@199.326,47.613 D_UP_1.1@199.326,48.737 D_UP_1.1@199.326,49.937 ; D_END_1.1@214.566,49.518 D_END_1.1@214.566,50.642 D_END_1.1@214.566,51.842 ; D_Z_1.1@39.306,50.316 D_Z_1.1@39.306,51.207 40.432,51.207 D_X_1.1@52.006,51.207 ; D_X_1.1@52.006,50.179 59.208,50.179 60.37,51.34 D_C_1.1@67.246,51.34 ; D_X_1.1@52.006,50.179 52.006,50.497 D_X_1.1@52.006,50.642 D_X_1.1@52.006,51.207 ; D_C_1.1@67.246,51.34 D_C_1.1@67.246,51.842 68.372,51.842 D_V_1.1@79.384,51.842 ; D_M_1.1@120.587,51.842 120.587,52.218 131.786,52.218 132.161,51.842 D_COMMA_1.1@133.286,51.842 D_COMMA_1.1@133.849,51.842 ; D_COMMA_1.1@133.849,51.842 134.412,51.842 D_DOT_1.1@145.987,51.842 D_DOT_1.1@145.987,50.642 D_DOT_1.1@145.987,50.163 ; D_DOT_1.1@145.987,50.163 156.784,50.163 157.7,51.079 D_SLASH_1.1@161.226,51.079
  B.Cu w0.25: D_B_1.1@92.647,51.842 D_N_1.1@107.886,51.842 ; D_SLASH_1.1@161.226,51.842 174.337,51.842 176.242,49.937 D_RSHIFT_1.1@186.626,49.937 D_UP_1.1@199.326,49.937 207.582,49.937 209.486,51.842 D_END_1.1@214.566,51.842 215.692,51.842 215.875,52.026 266.108,52.026 U1.6@268.604,49.53
row5: D_DOWN_1.1 D_FN_1.1 D_LALT_1.1 D_LCTRL_1.1 D_LEFT_1.1 D_OS_1.1 D_RALT_1.1 D_RCTRL_1.1 D_RIGHT_1.1 D_SPACE_1.1 U1.7 | length 279.1
  F.Cu w0.25: D_LCTRL_1.1@16.447,49.518 D_LCTRL_1.1@16.447,50.642 D_LCTRL_1.1@16.447,51.842 ; D_OS_1.1@26.607,47.613 D_OS_1.1@26.607,48.737 D_OS_1.1@26.607,49.937 27.732,49.937 31.542,53.747 D_LALT_1.1@54.546,53.747 ; D_LALT_1.1@54.546,51.423 D_LALT_1.1@54.546,52.547 D_LALT_1.1@54.546,53.747 ; D_SPACE_1.1@95.186,51.423 D_SPACE_1.1@95.186,52.547 D_SPACE_1.1@95.186,53.747 ; D_RALT_1.1@148.526,51.423 D_RALT_1.1@148.526,52.547 148.526,53.185 D_RALT_1.1@149.089,53.747 ; D_RCTRL_1.1@176.466,49.518 D_RCTRL_1.1@176.466,50.642 D_RCTRL_1.1@176.466,51.423 ; D_LEFT_1.1@189.166,49.518 D_LEFT_1.1@189.166,50.642 D_LEFT_1.1@189.166,51.842 ; D_DOWN_1.1@201.867,49.518 D_DOWN_1.1@201.867,50.642 D_DOWN_1.1@201.867,51.842 190.292,51.842 D_LEFT_1.1@189.166,51.842 ; D_RIGHT_1.1@217.106,51.423 D_RIGHT_1.1@217.106,52.198 ; D_RIGHT_1.1@217.106,53.747 D_RIGHT_1.1@217.106,52.547 D_RIGHT_1.1@217.106,52.198 ; U1.7@266.064,49.53 263.397,52.198 D_RIGHT_1.1@217.106,52.198 ; D_LALT_1.1@54.546,53.747 94.061,53.747 D_SPACE_1.1@95.186,53.747 ; D_SPACE_1.1@95.186,53.747 95.186,54.123 147.026,54.123 147.401,53.747 D_RALT_1.1@148.526,53.747 D_RALT_1.1@149.089,53.747 ; D_RALT_1.1@149.089,53.747 149.652,53.747 151.144,55.24 161.149,55.24 162.641,53.747 D_FN_1.1@163.766,53.747 D_FN_1.1@163.766,52.547 D_FN_1.1@163.766,51.423 164.692,51.423 D_RCTRL_1.1@176.466,51.423 ; D_RCTRL_1.1@176.466,51.423 D_RCTRL_1.1@176.466,51.842 188.041,51.842 D_LEFT_1.1@189.166,51.842
  B.Cu w0.25: D_LCTRL_1.1@16.447,51.842 17.572,51.842 19.477,49.937 D_OS_1.1@26.607,49.937 ; D_DOWN_1.1@201.867,51.842 202.992,51.842 204.897,53.747 D_RIGHT_1.1@217.106,53.747
pads on no net: H_KEYS_BL.1 H_KEYS_BM.1 H_KEYS_BR.1 H_KEYS_TL.1 H_KEYS_TM.1 H_KEYS_TR.1 H_PLATE_BL.1 H_PLATE_BR.1 H_PLATE_MB.1 H_PLATE_TL.1 H_PLATE_TM.1 H_PLATE_TR.1 MX_0_1.Un1 MX_0_1.Un2 MX_0_1.Un3 MX_1_1.Un1 MX_1_1.Un2 MX_1_1.Un3 MX_2_1.Un1 MX_2_1.Un2 MX_2_1.Un3 MX_3_1.Un1 MX_3_1.Un2 MX_3_1.Un3 MX_4_1.Un1 MX_4_1.Un2 MX_4_1.Un3 MX_5_1.Un1 MX_5_1.Un2 MX_5_1.Un3 MX_6_1.Un1 MX_6_1.Un2 MX_6_1.Un3 MX_7_1.Un1 MX_7_1.Un2 MX_7_1.Un3 MX_8_1.Un1 MX_8_1.Un2 MX_8_1.Un3 MX_9_1.Un1 MX_9_1.Un2 MX_9_1.Un3 MX_A_1.Un1 MX_A_1.Un2 MX_A_1.Un3 MX_B_1.Un1 MX_B_1.Un2 MX_B_1.Un3 MX_BSLSH_1.Un1 MX_BSLSH_1.Un2 MX_BSLSH_1.Un3 MX_BSPACE_1.Un1 MX_BSPACE_1.Un2 MX_BSPACE_1.Un3 MX_BSPACE_1.Un4 MX_BSPACE_1.Un5 MX_BSPACE_1.Un6 MX_BSPACE_1.Un7 MX_C_1.Un1 MX_C_1.Un2 MX_C_1.Un3 MX_CAPS_1.Un1 MX_CAPS_1.Un2 MX_CAPS_1.Un3 MX_COMMA_1.Un1 MX_COMMA_1.Un2 MX_COMMA_1.Un3 MX_D_1.Un1 MX_D_1.Un2 MX_D_1.Un3 MX_DEL_1.Un1 MX_DEL_1.Un2 MX_DEL_1.Un3 MX_DOT_1.Un1 MX_DOT_1.Un2 MX_DOT_1.Un3 MX_DOWN_1.Un1 MX_DOWN_1.Un2 MX_DOWN_1.Un3 MX_E_1.Un1 MX_E_1.Un2 MX_E_1.Un3 MX_END_1.Un1 MX_END_1.Un2 MX_END_1.Un3 MX_ENTER_1.Un1 MX_ENTER_1.Un2 MX_ENTER_1.Un3 MX_ENTER_1.Un4 MX_ENTER_1.Un5 MX_ENTER_1.Un6 MX_ENTER_1.Un7 MX_EQUALS_1.Un1 MX_EQUALS_1.Un2 MX_EQUALS_1.Un3 MX_ESC_1.Un1 MX_ESC_1.Un2 MX_ESC_1.Un3 MX_F1_1.Un1 MX_F1_1.Un2 MX_F1_1.Un3 MX_F2_1.Un1 MX_F2_1.Un2 MX_F2_1.Un3 MX_F3_1.Un1 MX_F3_1.Un2 MX_F3_1.Un3 MX_F4_1.Un1 MX_F4_1.Un2 MX_F4_1.Un3 MX_F5_1.Un1 MX_F5_1.Un2 MX_F5_1.Un3 MX_F6_1.Un1 MX_F6_1.Un2 MX_F6_1.Un3 MX_F7_1.Un1 MX_F7_1.Un2 MX_F7_1.Un3 MX_F8_1.Un1 MX_F8_1.Un2 MX_F8_1.Un3 MX_F9_1.Un1 MX_F9_1.Un2 MX_F9_1.Un3 MX_F10_1.Un1 MX_F10_1.Un2 MX_F10_1.Un3 MX_F11_1.Un1 MX_F11_1.Un2 MX_F11_1.Un3 MX_F12_1.Un1 MX_F12_1.Un2 MX_F12_1.Un3 MX_F_1.Un1 MX_F_1.Un2 MX_F_1.Un3 MX_FN_1.Un1 MX_FN_1.Un2 MX_FN_1.Un3 MX_G_1.Un1 MX_G_1.Un2 MX_G_1.Un3 MX_H_1.Un1 MX_H_1.Un2 MX_H_1.Un3 MX_HOME_1.Un1 MX_HOME_1.Un2 MX_HOME_1.Un3 MX_I_1.Un1 MX_I_1.Un2 MX_I_1.Un3 MX_J_1.Un1 MX_J_1.Un2 MX_J_1.Un3 MX_K_1.Un1 MX_K_1.Un2 MX_K_1.Un3 MX_L_1.Un1 MX_L_1.Un2 MX_L_1.Un3 MX_LALT_1.Un1 MX_LALT_1.Un2 MX_LALT_1.Un3 MX_LBRAC_1.Un1 MX_LBRAC_1.Un2 MX_LBRAC_1.Un3 MX_LCTRL_1.Un1 MX_LCTRL_1.Un2 MX_LCTRL_1.Un3 MX_LEFT_1.Un1 MX_LEFT_1.Un2 MX_LEFT_1.Un3 MX_LSHIFT_1.Un1 MX_LSHIFT_1.Un2 MX_LSHIFT_1.Un3 MX_LSHIFT_1.Un4 MX_LSHIFT_1.Un5 MX_LSHIFT_1.Un6 MX_LSHIFT_1.Un7 MX_M_1.Un1 MX_M_1.Un2 MX_M_1.Un3 MX_MINUS_1.Un1 MX_MINUS_1.Un2 MX_MINUS_1.Un3 MX_N_1.Un1 MX_N_1.Un2 MX_N_1.Un3 MX_O_1.Un1 MX_O_1.Un2 MX_O_1.Un3 MX_OS_1.Un1 MX_OS_1.Un2 MX_OS_1.Un3 MX_P_1.Un1 MX_P_1.Un2 MX_P_1.Un3 MX_PAUSE_1.Un1 MX_PAUSE_1.Un2 MX_PAUSE_1.Un3 MX_PGDN_1.Un1 MX_PGDN_1.Un2 MX_PGDN_1.Un3 MX_PGUP_1.Un1 MX_PGUP_1.Un2 MX_PGUP_1.Un3 MX_PRTSC_1.Un1 MX_PRTSC_1.Un2 MX_PRTSC_1.Un3 MX_Q_1.Un1 MX_Q_1.Un2 MX_Q_1.Un3 MX_QUOTE_1.Un1 MX_QUOTE_1.Un2 MX_QUOTE_1.Un3 MX_R_1.Un1 MX_R_1.Un2 MX_R_1.Un3 MX_RALT_1.Un1 MX_RALT_1.Un2 MX_RALT_1.Un3 MX_RBRAC_1.Un1 MX_RBRAC_1.Un2 MX_RBRAC_1.Un3 MX_RCTRL_1.Un1 MX_RCTRL_1.Un2 MX_RCTRL_1.Un3 MX_RIGHT_1.Un1 MX_RIGHT_1.Un2 MX_RIGHT_1.Un3 MX_RSHIFT_1.Un1 MX_RSHIFT_1.Un2 MX_RSHIFT_1.Un3 MX_S_1.Un1 MX_S_1.Un2 MX_S_1.Un3 MX_SEMIC_1.Un1 MX_SEMIC_1.Un2 MX_SEMIC_1.Un3 MX_SLASH_1.Un1 MX_SLASH_1.Un2 MX_SLASH_1.Un3 MX_SPACE_1.Un1 MX_SPACE_1.Un2 MX_SPACE_1.Un3 MX_SPACE_1.Un4 MX_SPACE_1.Un5 MX_SPACE_1.Un6 MX_SPACE_1.Un7 MX_T_1.Un1 MX_T_1.Un2 MX_T_1.Un3 MX_TAB_1.Un1 MX_TAB_1.Un2 MX_TAB_1.Un3 MX_TILDE_1.Un1 MX_TILDE_1.Un2 MX_TILDE_1.Un3 MX_U_1.Un1 MX_U_1.Un2 MX_U_1.Un3 MX_UP_1.Un1 MX_UP_1.Un2 MX_UP_1.Un3 MX_V_1.Un1 MX_V_1.Un2 MX_V_1.Un3 MX_W_1.Un1 MX_W_1.Un2 MX_W_1.Un3 MX_X_1.Un1 MX_X_1.Un2 MX_X_1.Un3 MX_Y_1.Un1 MX_Y_1.Un2 MX_Y_1.Un3 MX_Z_1.Un1 MX_Z_1.Un2 MX_Z_1.Un3

## Keep-outs
Edge.Cuts:
  lines w0.15: 0,-110.49 ccw(c3.81,-110.49) 3.81,-114.3 ; 0,-110.49 ccw(c3.81,-110.49) 3.81,-114.3 ; 0,-110.49 0,52.705 ; 0,-110.49 0,52.705 ; 0,52.705 cw(c3.81,52.705) 3.81,56.515 ; 0,52.705 cw(c3.81,52.705) 3.81,56.515 ; 3.81,-114.3 300.99,-114.3 ; 3.81,-114.3 300.99,-114.3 ; 3.81,56.515 300.99,56.515 ; 3.81,56.515 300.99,56.515 ; 300.99,-114.3 ccw(c300.99,-110.49) 304.8,-110.49 ; 300.99,-114.3 ccw(c300.99,-110.49) 304.8,-110.49 ; 300.99,56.515 cw(c300.99,52.705) 304.8,52.705 ; 300.99,56.515 cw(c300.99,52.705) 304.8,52.705 ; 304.8,-110.49 304.8,52.705 ; 304.8,-110.49 304.8,52.705

## Silkscreen, mask and mechanical layers (free items; w line width, h text height)
F.SilkS:
  text "00Key" at 290.235,42.474 h4
  text "By 001" at 291.402,38.238 h2

## Text inside footprints (layer, text, board x,y; h text height)
U1: F.SilkS "USB Host" at 269.491,44.113 h1; F.SilkS "Ethernet" at 264.442,37.666 h1 r90; F.SilkS "USB" at 279.049,41.502 h1 r90; F.SilkS "Micro SD" at 226.95,41.624 h1; F.SilkS "MIMXRT1062" at 253.564,40.895 h0.7 r90; F.SilkS "DVJ6A" at 254.888,41.264 h0.7 r90